# Altium PCB AAI R2.PcbDoc
Units mm, origin at the board's own origin, x right, y up, seen from the top; angles counter-clockwise.
Board outline 63.96 x 57.73 mm, 2 copper layers (Top Layer, Bottom Layer); 15 components, 10 nets, 33 pads, 9 vias.
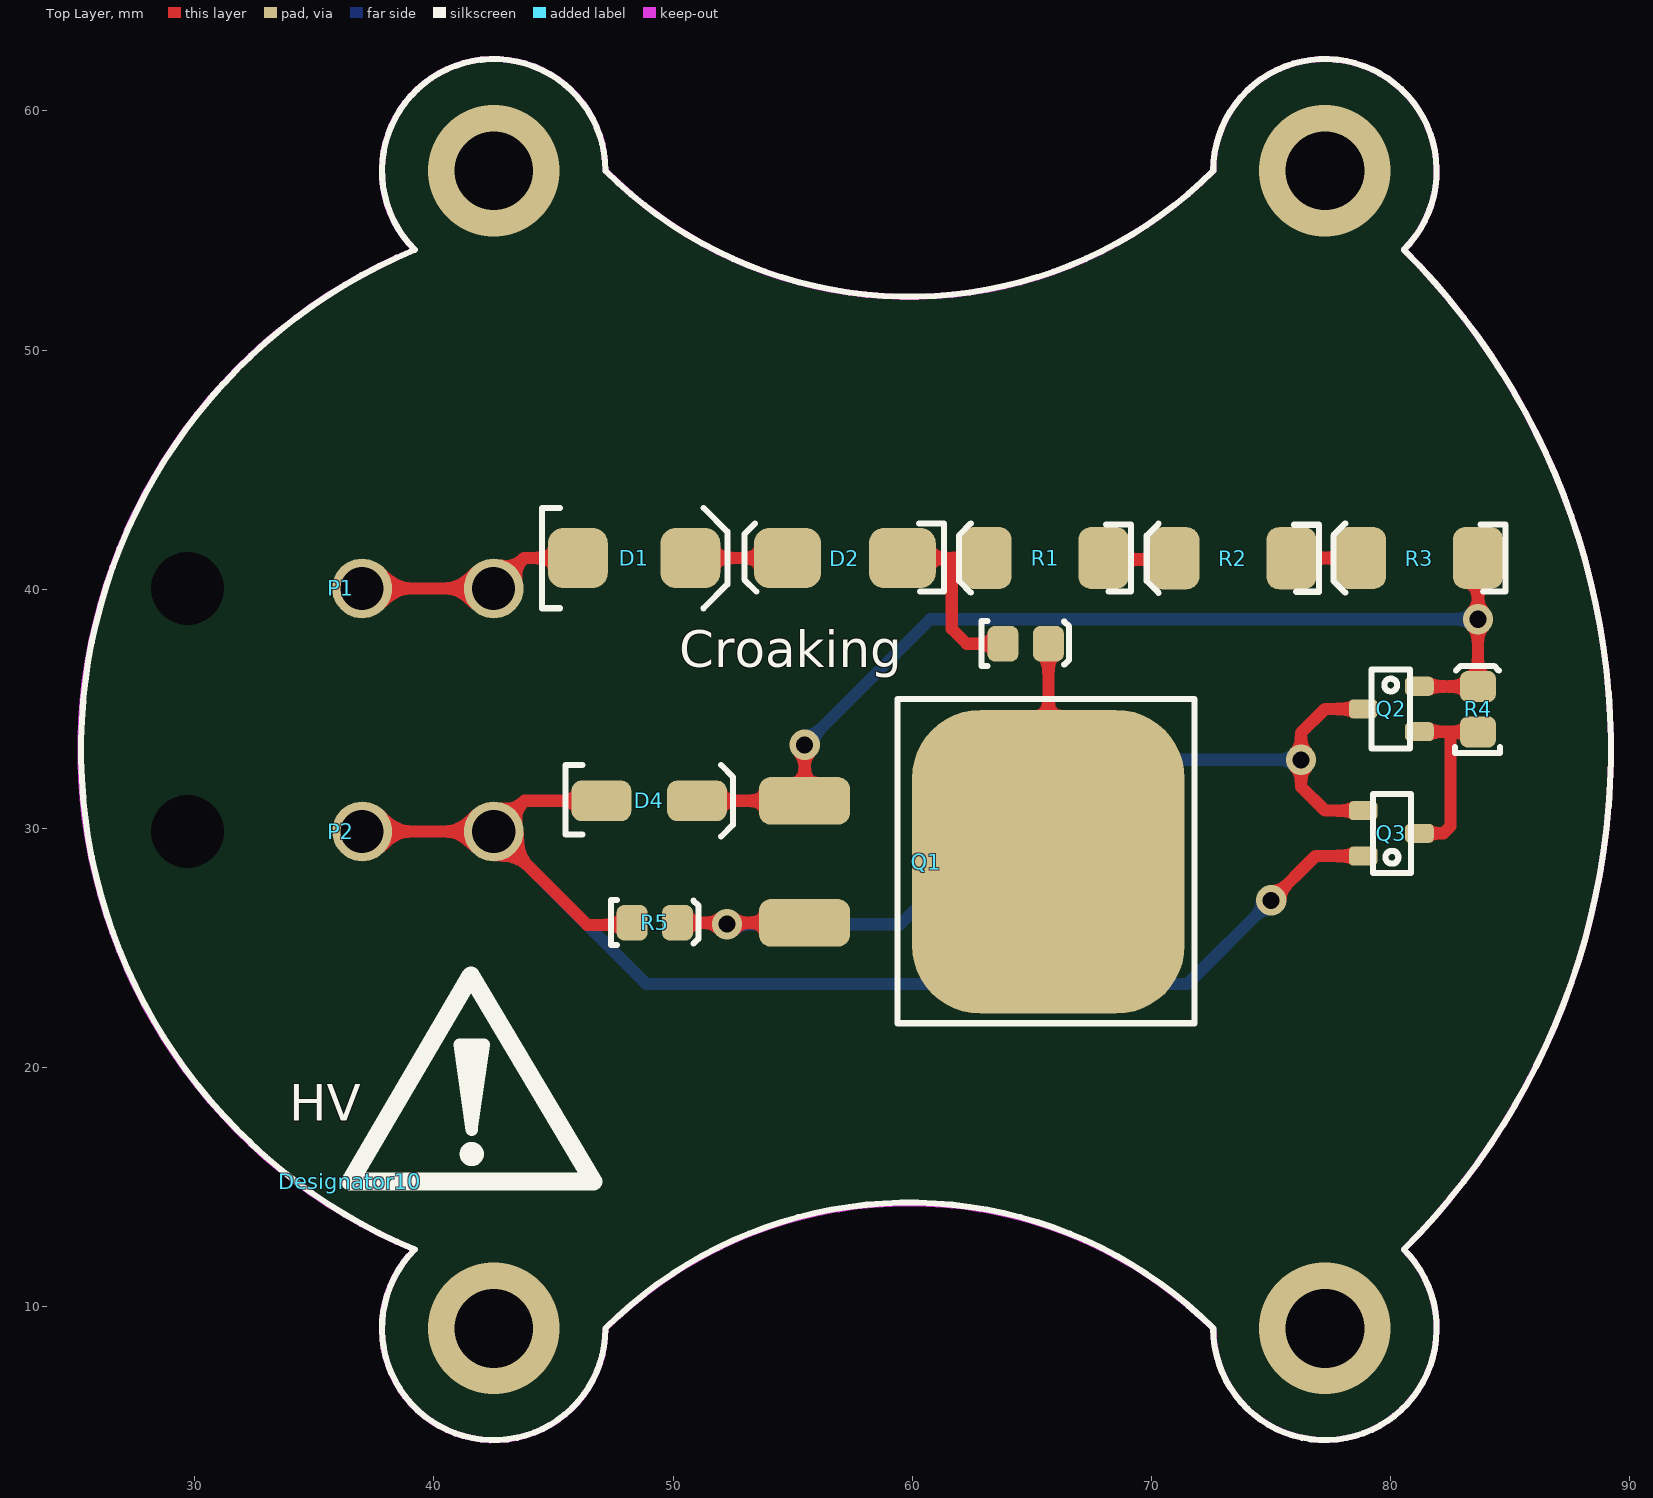
[diagram p0: Top Layer view]
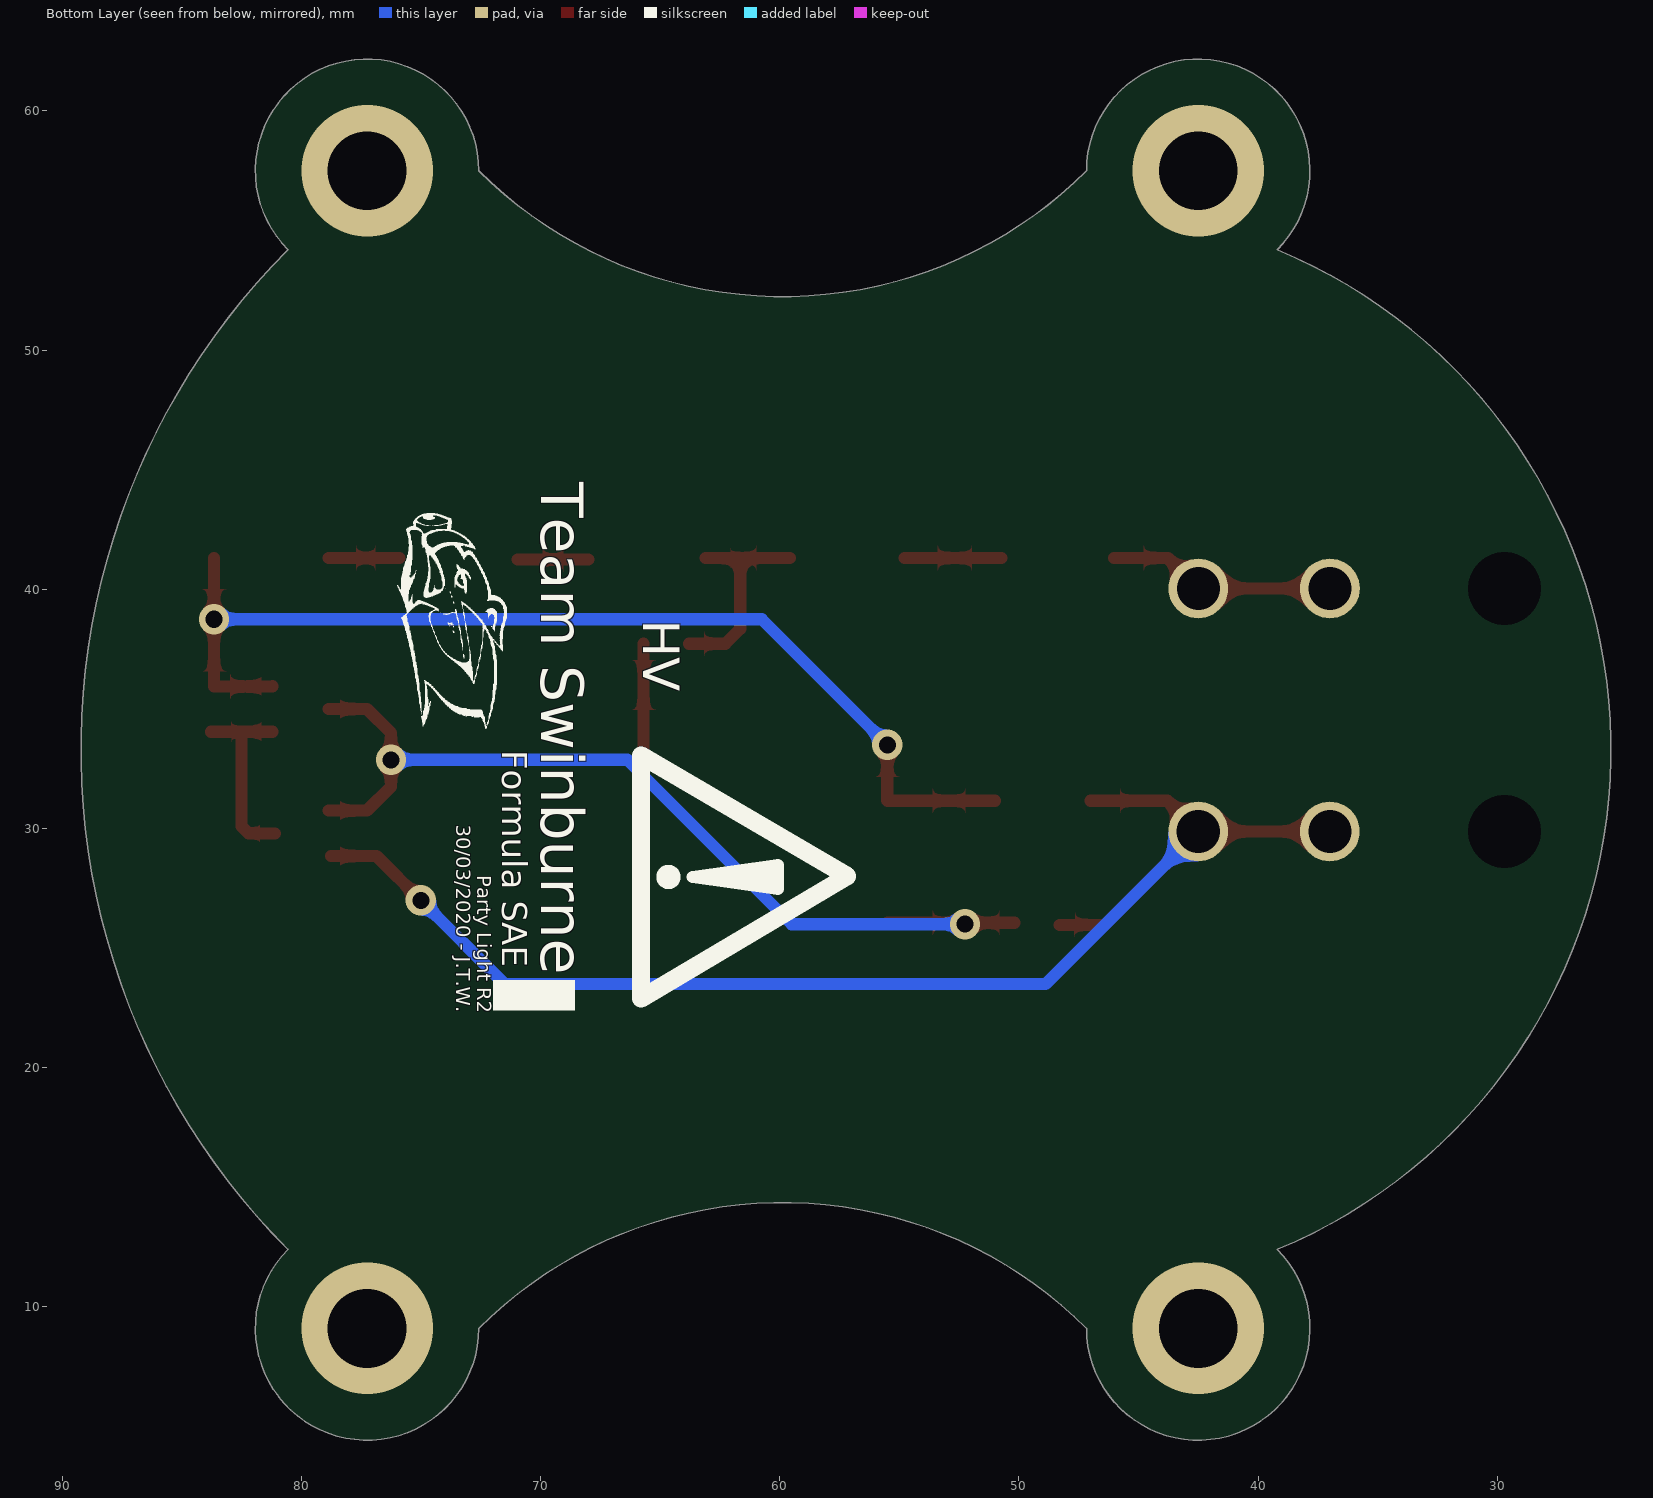
[diagram p1: Bottom Layer view, seen from below]
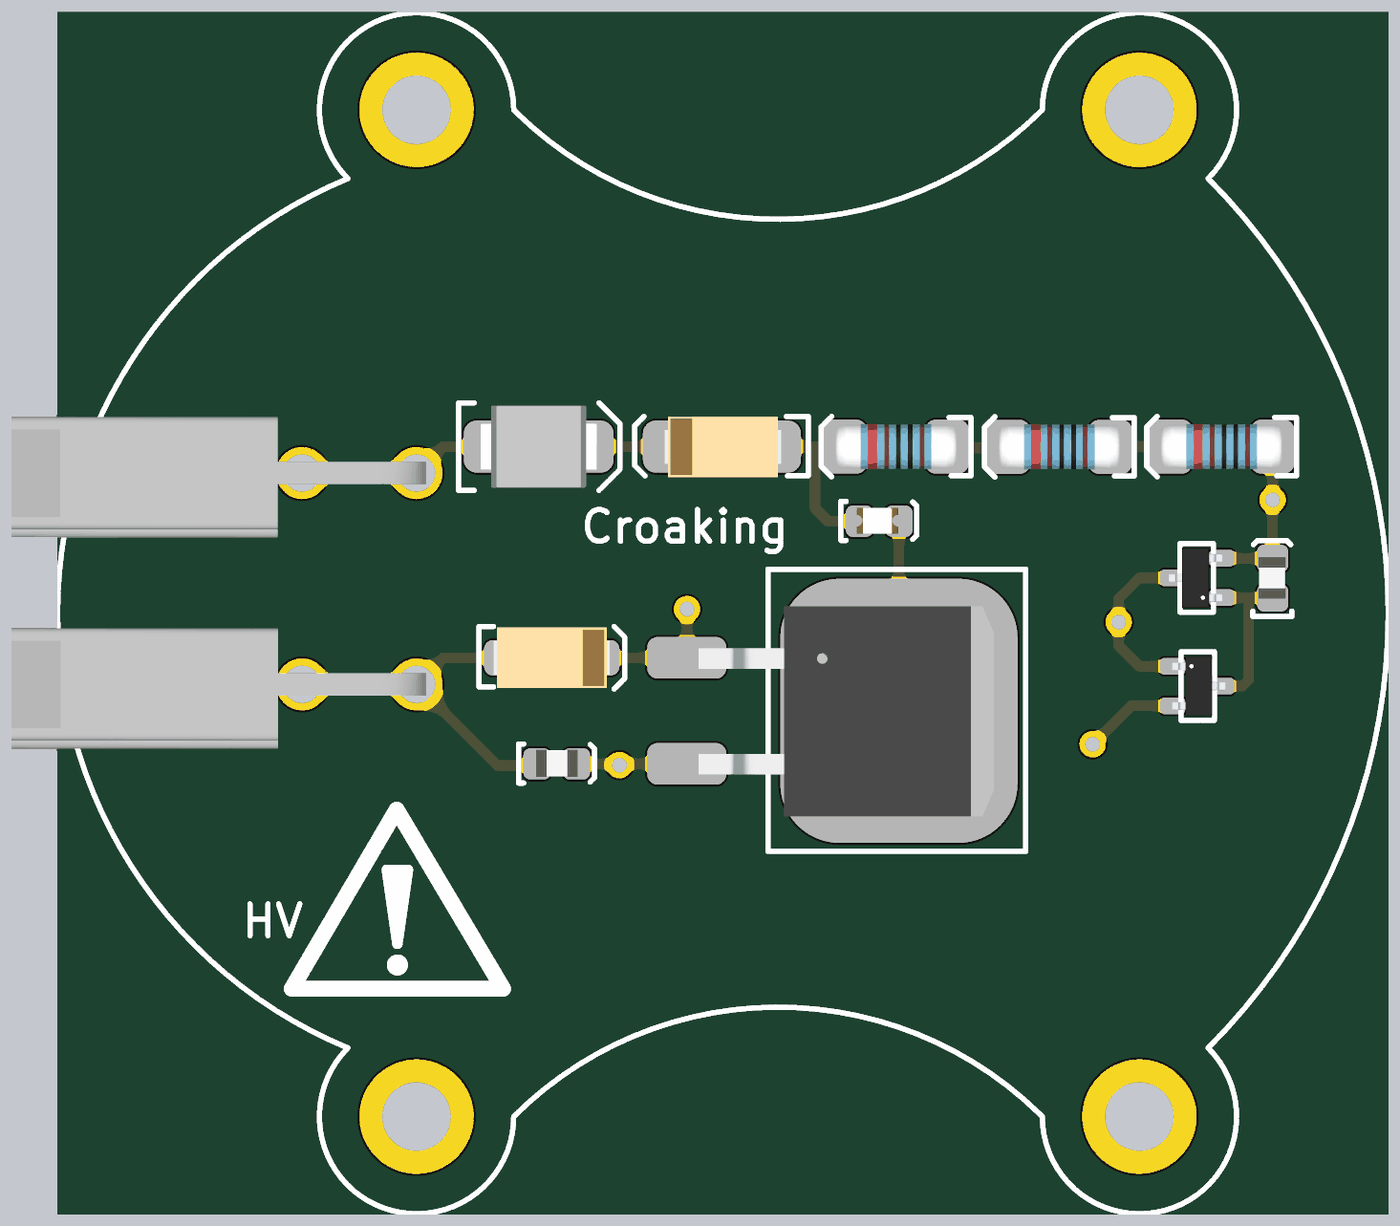
[diagram p2: 3D render of the assembled board from above, using the file's embedded part models]

## Layer stack, top to bottom
Top Solder: solder mask 0.025, SM-004, Dk 4
Top Layer: signal copper 0.0356
Dielectric 1: dielectric 0.32, FR-4, Dk 4.8
Bottom Layer: signal copper 0.0356
Bottom Solder: solder mask 0.025, SM-004, Dk 4

## Board outline
39.198,12.404 cw(c47.871,33.301) 39.198,54.198 cw(c42.5,57.5) 47.17,57.5 ccw(c59.875,70.205) 72.58,57.5 cw(c77.25,57.5) 80.552,54.198 cw(c59.656,33.301) 80.552,12.404 cw(c77.25,9.102) 72.58,9.102 ccw(c59.875,-3.603) 47.17,9.102 cw(c42.5,9.102)

## Design rules (kind name [scope] priority, off if disabled: settings)
Clearance [All] p1: gap=0.254 ignorepadtopadclearanceinfootprint=FALSE except(0: Arc-Hole Track-Hole SMDPad-Hole THPad-Hole Via-Hole Fill-Hole Poly-Hole Region-Hole Text-Hole)
PolygonConnect [All] p1: connectstyle=Relief reliefconductorwidth=0.254 reliefentries=4 polygonreliefangle="90 Angle" airgapwidth=0.254
RoutingVias [All] p1: holewidth=0.711 width=1.27 viastyle="Through Hole" minholewidth=0.711 minwidth=1.27 maxholewidth=0.711 maxwidth=1.27
SolderMaskExpansion [All] p1: expansion=0.102 istentingtop=FALSE
Width [All] p1: maxlimit=1.27 minlimit=0.254 preferedwidth=0.635 minimp=50.000000 maximp=50.000000 favimp=50.000000
30 further rules are at their usual default settings.

## Components (designator, comment, footprint, x,y, rotation, side; value= is the part's Value field where it differs from the comment)
Croaking "Red" "0805 LED" 64.75,37.75 r0 top (schematic designator D3)
D1 "SD560BTR" "SMB Diode" 46.27,41.31 r0 top
D2 "1SMB5942B-13" "DI SMB Diode" 59.33,41.31 r180 top
D4 "SMAZ5V6-13-F" "DI SMA Diode" 47,31.16 r0 top
Designator10 "Comment" "~HV Silk" 36.5,15.25 r0 top
P1 "39301022" 39301022 42.497,40.04 r270 top
P2 "39301022" 39301022 42.5,29.88 r270 top
Q1 "R6015ENJTL" "R TO-263 N-MOSFET" 65.688,28.61 r270 top
Q2 "BC858ALT1G" "ON TO-236-3 BJT" 79,35 r270 top
Q3 "BC848ALT1G" "ON TO-236-3 BJT" 81.05,29.8 r90 top
R1 "330K" "VB 0207" 68,41.31 r180 top
R2 "330K" "VB 0207" 75.85,41.3 r180 top
R3 "330K" "VB 0207" 83.65,41.31 r180 top
R4 "10k" 0805 83.624,35 r90 top
R5 "240R" 0805 49.25,26.086 r0 top

## Footprints (in the part's own frame and the unit in brackets; to place one, negate y for a bottom-side part, rotate by r counter-clockwise, add the part's x,y. Pads: shape width x height; smd on the part's side, far side on the other; paste and mask are expansions set on the pad)
0805 [mm]
  rrect50% 1.3x1.5 smd: 1(-0.962,-0.026) 2(0.938,-0.026)
  silkscreen extent -1.85,-0.95 1.8,0.93, body extent -1,-0.65 1,0.66, height 0.73
"0805 LED" [mm]
  rrect50% 1.3x1.5 smd: A(-0.962,-0.026) K(0.938,-0.026)
  silkscreen extent -1.85,-0.95 1.8,0.93, body extent -1.1,-0.62 0.9,0.62, height 1
39301022 [mm]
  round 2.5 hole 1.8: 1(0,-5.5) 2(0,0)
  round 1.524 hole 3.05: ""(0,-12.8)
  body extent -2.7,-19.47 3.1,0.47, height 11.4
"DI SMA Diode" [mm]
  rrect50% 2.5x1.7 smd: A(0,0) K(4,0)
  silkscreen extent -1.5,-1.5 5.5,1.5, body extent -0.8,-1.46 4.79,1.46, height 2.35
"DI SMB Diode" [mm]
  rrect50% 2.8x2.5 smd: A(-0.25,0) K(4.55,0)
  silkscreen extent -2,-1.45 6.35,1.4, body extent -0.69,-1.45 4.89,1.47, height 2.35
"ON TO-236-3 BJT" [mm]
  rrect50% 0.8x1.2 smd: B(0.95,2.2) C(0,-0.15) E(-0.95,2.2)
  silkscreen extent -1.65,0.2 1.65,1.8, body extent -1.45,-0.35 1.45,2.25, height 1
"R TO-263 N-MOSFET" [mm]
  rrect50% 12.7x11.4 smd: D(0,0)
  rrect50% 2x3.8 smd: G(-2.55,-10.2) S(2.55,-10.2)
  silkscreen extent -6.8,-6.3 6.75,6.1, body extent -5.03,-9.64 5.08,4.56, height 4.7
"SMB Diode" [mm]
  rrect50% 2.5x2.5 smd: A(-0.25,0) K(4.45,0)
  silkscreen extent -1.75,-2.1 6,2.1, body extent -0.69,-1.97 4.9,1.97, height 2.5
"VB 0207" [mm]
  rrect50% 2.1x2.6 smd: 1(0,0) 2(4.9,0)
  silkscreen extent -1.15,-1.45 6.05,1.45, body extent -0.45,-1.1 5.35,1.1, height 2.19
"~HV Silk" [mm] "HV Symbol Silkscreen overlay"
  silkscreen extent 0,0 10.16,8.61

## Part data
Croaking: library part SML-210LTT86, "Red LED Indication - Discrete 1.75V 0805 (2012 Metric)", Digikey Part Number=511-1286-1-ND, Manufacturer="ROHM Semiconductor", Colour=Red, Digikey Link=https://www.digikey.com/product-detail/en/rohm-semiconductor/SML-210LTT86/511-1286-1-ND/637099, Part Number=SML-210LTT86
D1: "1.2V_F 600V 5A SMB", Digikey Part Number=1655-1530-2-ND, Manufacturer="SMC Diode Solutions", Digikey Link=https://www.digikey.com/product-detail/en/smc-diode-solutions/SD560BTR/1655-1530-2-ND/6022620, Part Number=SD560BTR
D2: "DIODE ZENER 51V 3W SMB", Digikey Part Number=1SMB5942B-13DICT-ND, Manufacturer="Diodes Inc", Digikey Link=https://www.digikey.com/product-detail/en/diodes-incorporated/1SMB5942B-13/1SMB5942B-13DICT-ND/5054245, Part Number=1SMB5942B-13
D4: "DIODE ZENER 5.6V 1W SMA", Digikey Part Number=SMAZ5V6-FDICT-ND, Manufacturer="Diodes Inc", Digikey Link=https://www.digikey.com/product-detail/en/diodes-incorporated/SMAZ5V6-13-F/SMAZ5V6-FDICT-ND/755500, Part Number=SMAZ5V6-13-F
P1 P2: Digikey Part Number=WM21363-ND, Angle=90, Contact=Gold, Digikey Link=https://www.digikey.com/product-detail/en/molex/0039301022/WM21363-ND/930332, Flange=No, Part Number=39301022, Pitch=4.20mm, Positions=2, Row Spacing=4.2mm
Q1: "MOSFET N-CH 600V 15A LPT", Digikey Part Number=R6015ENJTLCT-ND, Manufacturer="Rohm Semiconductor", Digikey Link=https://www.digikey.com.au/product-detail/en/rohm-semiconductor/R6015ENJTL/R6015ENJTLCT-ND/5042516, LatestRevisionDate=29-May-2009, LatestRevisionNote="IPC-7351 Footprint Added.", PackageDescription="4-Pin SOT-343 Package 1.3 mm Pitch, 2.1 mm Lead Span", PackageReference=SOT-343, PackageVersion=Sep-2000, Part Number=R6015ENJTL, Published=24-Mar-1999, Publisher="Altium Limited"
Q2: "TRANS PNP 30V 0.1A SOT-23", Digikey Part Number=BC858ALT1GOSCT-ND, Manufacturer="ON Semiconductor", Digikey Link=https://www.digikey.com.au/product-detail/en/on-semiconductor/BC858ALT1G/BC858ALT1GOSCT-ND/3462248?fbclid=IwAR0XE0JmsZu1bfxkpmh7_fMKeVVYT41RbargOB6Kv0hZlYRUvP_HzrN_yXU, Part Number=BC858ALT1G
Q3: "TRANS NPN 30V 0.1A SOT23", Digikey Part Number=BC848ALT1GOSCT-ND, Manufacturer="ON Semiconductor", Digikey Link=https://www.digikey.com/product-detail/en/on-semiconductor/BC848ALT1G/BC848ALT1GOSCT-ND/917837, Part Number=BC848ALT1G
R1 R2 R3: library part MMB02070C3303FB200, Digikey Part Number=MMB-330KBCT-ND, Manufacturer="Vishay Beyschlag", Rated Voltage=1W, Tolerance=0.01, Part Number=MMB02070C3303FB200
R4: library part RC0805FR0710KL, Manufacturer=YAGEO, Rated Voltage=0.125W, Tolerance=0.01, Material=FR-07, Part Number=RC0805FR0710KL
R5: library part RC0805FR07240RL, Manufacturer=YAGEO, Rated Voltage=0.125W, Tolerance=0.01, Material=FR-07, Part Number=RC0805FR07240RL

## Via types
v1: diameter 1.27, hole 0.711, Top Layer to Bottom Layer, 5 vias
v2: diameter 5.5, hole 3.3, Top Layer to Bottom Layer, 4 vias

## Nets (pads, with @x,y where several pads share a name; then routed paths per layer and width w, separated by ;. In a path a pad name is that pad's centre, name@x,y a point inside that pad or via, vN(x,y) a via of type N, cw(c..) or ccw(c..) an arc to the next point about the centre after c; other vN are vias at no path point)
BAT+: D1.A P1.1 P1.2 | length 9.5
  Top Layer w0.508: P1.1 P1.2 43.767,41.31 D1.A
BAT-: D4.A P2.1 P2.2 Q3.E R5.1 | length 59
  Top Layer w0.508: P2.1 P2.2 ; D4.A 43.78,31.16 P2.2 ; R5.1@48.288,25.974 46.406,25.974 P2.2 ; v1(75,27) 76.85,28.85 Q3.E@78.75,28.85
  Bottom Layer w0.508: P2.2 48.88,23.5 71.5,23.5 v1(75,27)
NetD1_K: D1.K D2.K | length 4.1
  Top Layer w0.508: D1.K D2.K
NetD2_A: Croaking.A D2.A R1.2 | length 8.9
  Top Layer w0.508: D2.A 61.65,41.31 ; R1.2 61.65,41.31 ; Croaking.A 62.276,37.724 61.65,38.35 61.65,41.31
NetD3_K: Croaking.K Q1.D | length 9.1
  Top Layer w0.508: Q1.D Croaking.K
NetD4_K: D4.K Q1.G Q2.E R3.1 R4.2 | length 45.1
  Top Layer w0.508: D4.K Q1.G 55.5,31.172 v1(55.5,33.5) ; Q2.E 81.212,35.938 R4.2 83.644,35.944 83.644,38.744 v1(83.65,38.75) R3.1
  Bottom Layer w0.508: v1(55.5,33.5) 60.75,38.75 v1@83.75,38.75
NetQ1_S: Q1.S Q2.C Q3.B R5.2 | length 40.4
  Top Layer w0.508: R5.2 Q1.S ; Q3.B 77.25,30.75 76.25,31.75 v1(76.25,32.875) 76.25,34 77.25,35 Q2.C
  Bottom Layer w0.508: v1(52.25,26) 59.5,26 66.375,32.875 v1(76.25,32.875)
NetQ2_B: Q2.B Q3.C R4.1 | length 8.1
  Top Layer w0.508: Q3.C@81.1,29.8 82.202,29.8 82.5,30.098 82.5,34.032 82.488,34.044 ; Q2.B 81.206,34.044 82.488,34.044 ; R4.1@83.776,34.038 83.77,34.044 82.488,34.044
NetR1_1: R1.1 R2.2 | length 2.9
  Top Layer w0.508: R1.1@68,41.25 R2.2@70.95,41.25
NetR2_1: R2.1 R3.2 | length 3
  Top Layer w0.508: R2.1@75.9,41.31 R3.2@78.85,41.31
pads on no net: P1. P2.
copper on no net:
  other v2: 42.5,9.102 77.25,9.102 42.5,57.5 77.25,57.5

## Keep-outs
Top Layer:
  lines w0.254: 39.194,12.394 cw(c47.834,33.294) 39.194,54.194 cw(c42.5,57.5) 47.175,57.5 ; 39.194,12.407 ccw(c42.5,9.102) 47.175,9.102 cw(c59.875,-3.717) 72.575,9.102 ; 47.183,57.5 ccw(c59.883,70.151) 72.583,57.5 cw(c77.25,57.5) 80.55,54.2 cw(c59.65,33.3) 80.55,12.4 cw(c77.251,9.101) 72.585,9.101

## Silkscreen, mask and mechanical layers (free items; w line width, h text height)
Top Overlay:
  the board outline again, w0.254
Bottom Overlay:
  drawing of 28 lines, arcs and shapes, not listed
  text "Team Swinburne" at 70.562,44.482 h3.05 r90
  text "HV" at 65.7,38.725 h1.52 r90
  text "Formula SAE" at 71.959,33.277 h1.78 r90
  text "30/03/2020 - J.T.W." at 73.737,30.161 h1.02 r90
  text "Party Light R2" at 72.848,28.051 h1.02 r90
Drill Drawing:
  lines w0.254: 24.284,90.868 25.978,90.868 25.978,92.562 24.284,92.562 24.284,90.868 ; 24.284,94.678 24.284,95.102 24.708,95.525 24.284,95.948 24.284,96.372 24.708,96.372 25.131,95.948 25.554,96.372 25.978,96.372 25.978,95.948 25.554,95.525 25.978,95.102 25.978,94.678 25.554,94.678 25.131,95.102 24.708,94.678 24.284,94.678 ; 24.284,100.182 25.978,100.182 25.131,98.489 24.284,100.182 ; 24.284,102.722 24.708,102.722 25.131,102.298 25.554,102.722 25.978,102.722 25.554,103.145 25.978,103.568 25.554,103.568 25.131,103.992 24.708,103.568 24.284,103.568 24.708,103.145 24.284,102.722
  lines w0.381: 22.765,89.725 290.001,89.725 ; 22.765,104.965 290.001,104.965 ; 36.758,85.915 36.758,108.775 ; 50.216,85.915 50.216,108.775 ; 79.418,85.915 79.418,108.775 ; 92.267,85.915 92.267,108.775 ; 110.906,85.915 110.906,108.775 ; 148.994,85.915 148.994,108.775 ; 163.976,85.915 163.976,108.775 ; 182.92,85.915 182.92,108.775 ; 199.425,85.915 199.425,108.775 ; 221.111,85.915 221.111,108.775 ; 254.984,85.915 254.984,108.775 ; 22.765,85.915 290.001,85.915 290.001,108.775 22.765,108.775 22.765,85.915
  text "Symbol" at 25.051,106.108 h1.83
  text "Count" at 37.901,106.108 h1.83
  text "Hole Size" at 51.359,106.108 h1.83
  text "Plated" at 80.561,106.108 h1.83
  text "Hole Type" at 93.41,106.108 h1.83
  text "Drill Layer Pair" at 112.049,106.108 h1.83
  text "Via/Pad" at 150.137,106.108 h1.83
  text "Pad Shape" at 165.119,106.108 h1.83
  text "Template" at 184.063,106.108 h1.83
  text "Description" at 200.568,106.108 h1.83
  text "Hole Tolerance (+)" at 222.254,106.108 h1.83
  text "Hole Tolerance (-)" at 256.127,106.108 h1.83
  text "2" at 37.901,102.298 h1.52
  text "120.08mil (3.050mm)" at 51.359,102.298 h1.52
  text "PTH" at 80.561,102.298 h1.52
  text "Round" at 93.41,102.298 h1.52
  text "Top Layer - Bottom Layer" at 112.049,102.298 h1.52
  text "Pad" at 150.137,102.298 h1.52
  text "Rounded" at 165.119,102.298 h1.52
  text "c152h305" at 184.063,102.298 h1.52
  text "4" at 37.901,98.489 h1.52
  text "70.87mil (1.800mm)" at 51.359,98.489 h1.52
  text "PTH" at 80.561,98.489 h1.52
  text "Round" at 93.41,98.489 h1.52
  text "Top Layer - Bottom Layer" at 112.049,98.489 h1.52
  text "Pad" at 150.137,98.489 h1.52
  text "Rounded" at 165.119,98.489 h1.52
  text "c250h180" at 184.063,98.489 h1.52
  text "4" at 37.901,94.678 h1.52
  text "129.92mil (3.300mm)" at 51.359,94.678 h1.52
  text "PTH" at 80.561,94.678 h1.52
  text "Round" at 93.41,94.678 h1.52
  text "Top Layer - Bottom Layer" at 112.049,94.678 h1.52
  text "Via" at 150.137,94.678 h1.52
  text "Rounded" at 165.119,94.678 h1.52
  text "v550h330" at 184.063,94.678 h1.52
  text "5" at 37.901,90.868 h1.52
  text "28.00mil (0.711mm)" at 51.359,90.868 h1.52
  text "PTH" at 80.561,90.868 h1.52
  text "Round" at 93.41,90.868 h1.52
  text "Top Layer - Bottom Layer" at 112.049,90.868 h1.52
  text "Via" at 150.137,90.868 h1.52
  text "Rounded" at 165.119,90.868 h1.52
  text "v127h71" at 184.063,90.868 h1.52
  text "15 Total" at 37.901,87.058 h1.52
  text "FABRICATION NOTES" at 93.434,78.472 h3
  text "1. QUANTITY: 5" at 93.434,73.376 h3
  text "2. SIZE:" at 93.184,68.379 h3
  text "3. LAYERS: 2" at 93.434,63.183 h3
  text "4. SIGNAL LAYERS: 1,2" at 93.434,59.086 h3
  text "a) WEIGHT: 2oz" at 98.434,52.99 h3
  text "5. SOLDER MASKS: Red" at 93.434,47.701 h3
  text "6. SILKSCREEN: White" at 93.434,42.604 h3
  text "7. SURFACE FINISH: HASL (With Lead)" at 93.434,37.508 h3
  text "8. FINISHED COPPER: 2oz Cu" at 93.434,32.412 h3
  text "9. TOTAL THICKNESS: 1.6mm" at 93.434,27.315 h3
  text "N.B. PLEASE CHECK THAT CLEARANCE CUTOUTS ARE ROUTED" at 92.825,10 h3
  text "FABRICATION NOTES" at 70.209,-188.103 h3
  text "1. QUANTITY: 5" at 70.209,-193.199 h3
  text "2. SIZE:" at 70.209,-198.296 h3
  text "3. LAYERS: 4" at 70.209,-203.392 h3
  text "4. SIGNAL LAYERS: 1,4" at 70.209,-207.489 h3
  text "a) WEIGHT: 2oz" at 75.209,-213.585 h3
  text "5. PLANES: 2" at 70.209,-218.681 h3
  text "a) WEIGHT: 2oz" at 75.209,-223.778 h3
  text "6. SOLDER MASKS: Red" at 70.209,-228.874 h3
  text "7. SILKSCREEN: White" at 70.209,-233.971 h3
  text "8. SURFACE FINISH: HASL (With Lead)" at 70.209,-239.067 h3
  text "9 FINISHED COPPER: 2oz Cu" at 70.209,-244.163 h3
  text "10. TOTAL THICKNESS: 1.6mm" at 70.209,-249.26 h3
  text "N.B. PLEASE CHECK THAT CLEARANCE CUTOUTS ARE ROUTED" at 69.6,-266.575 h3

## Text inside footprints (layer, text, board x,y; h text height)
Designator10: Top Overlay "HV" at 33.96,17.79 h1.52